# EAGLE board Micro_Bit_Gamer_Bit_Panel_v10 (EAGLE 7.5.0)
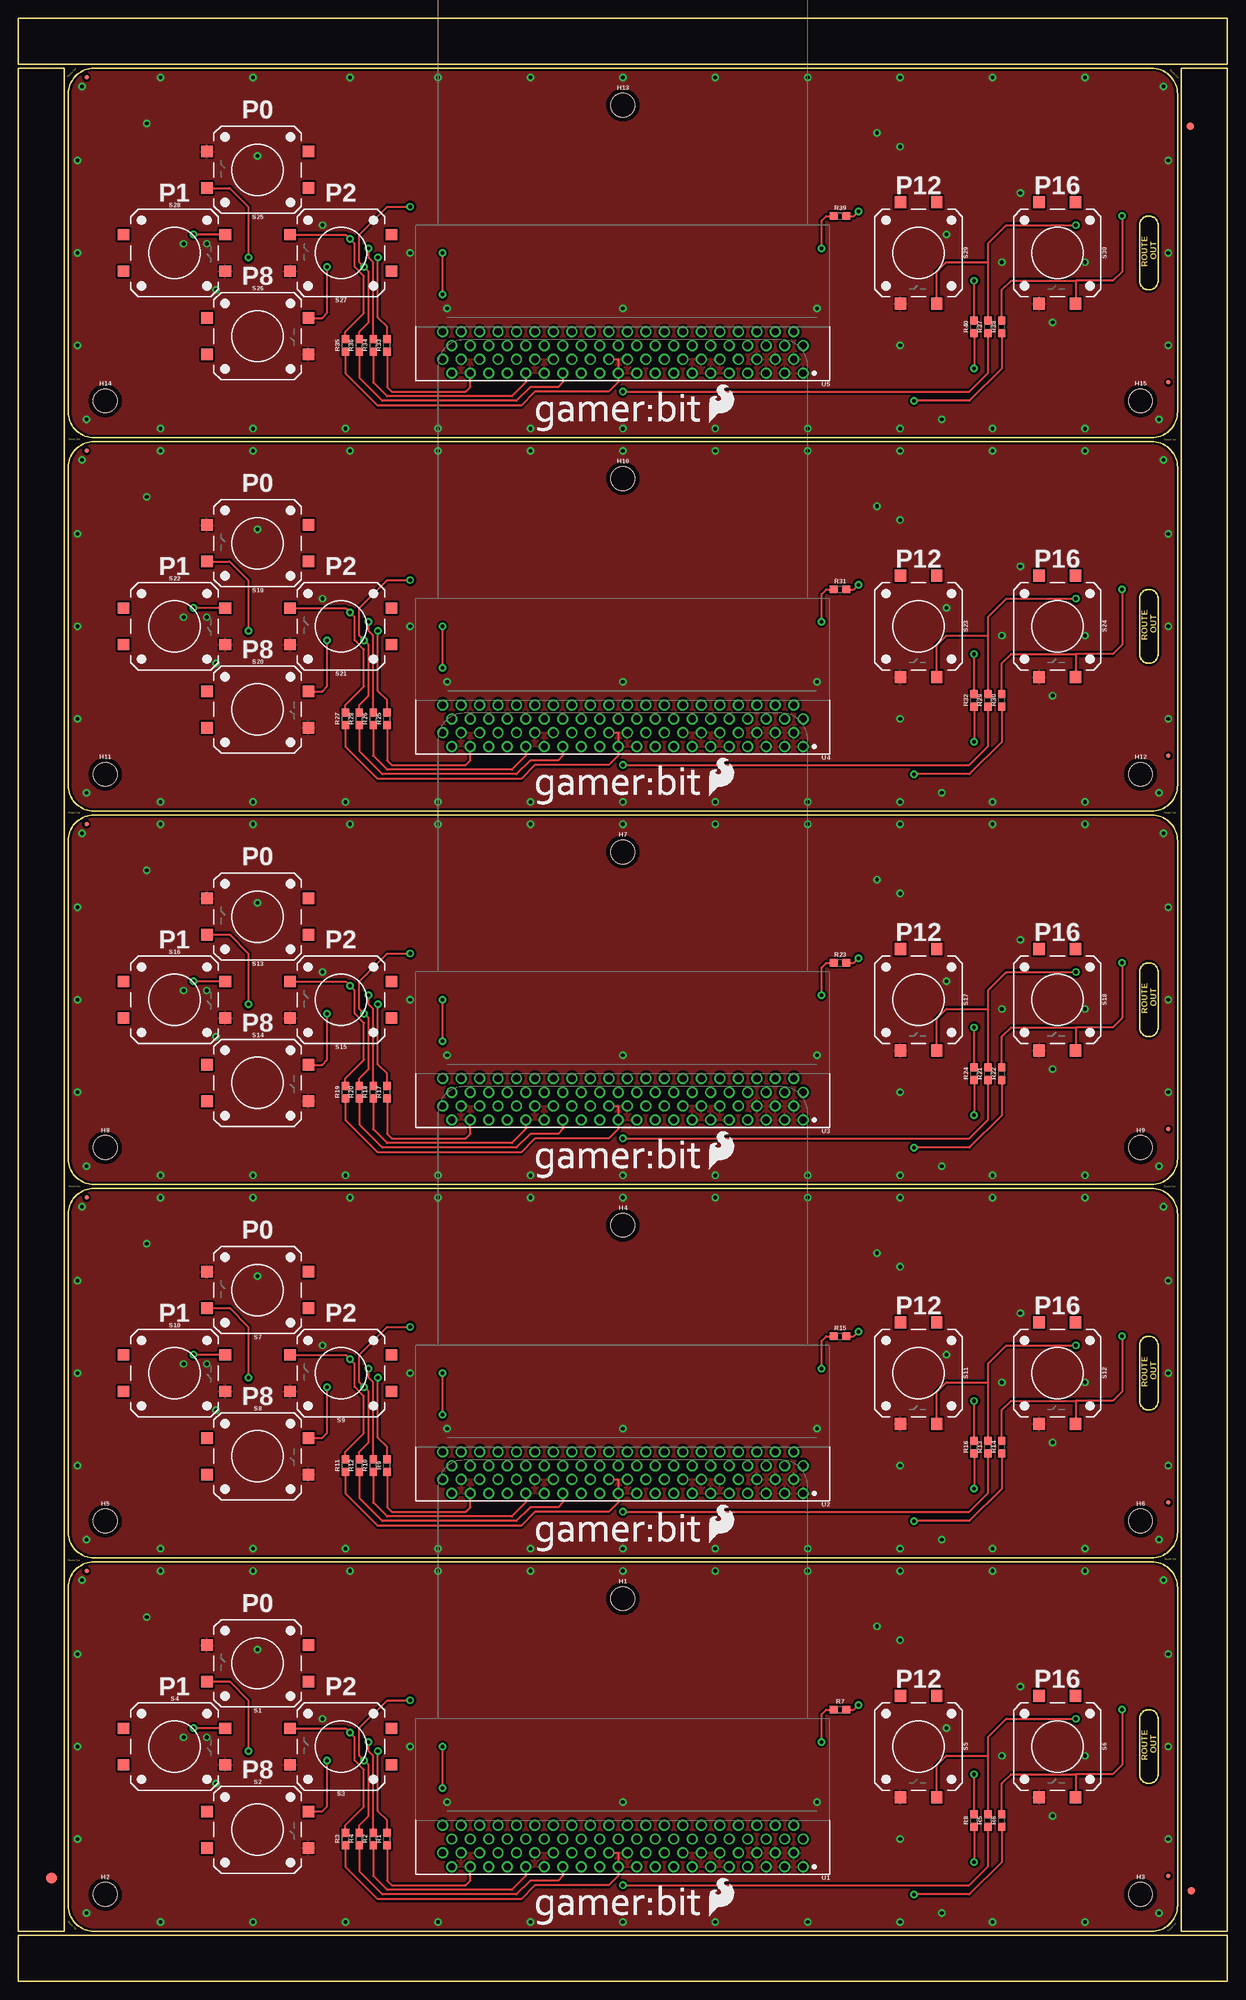
[diagram p0: board, top side]
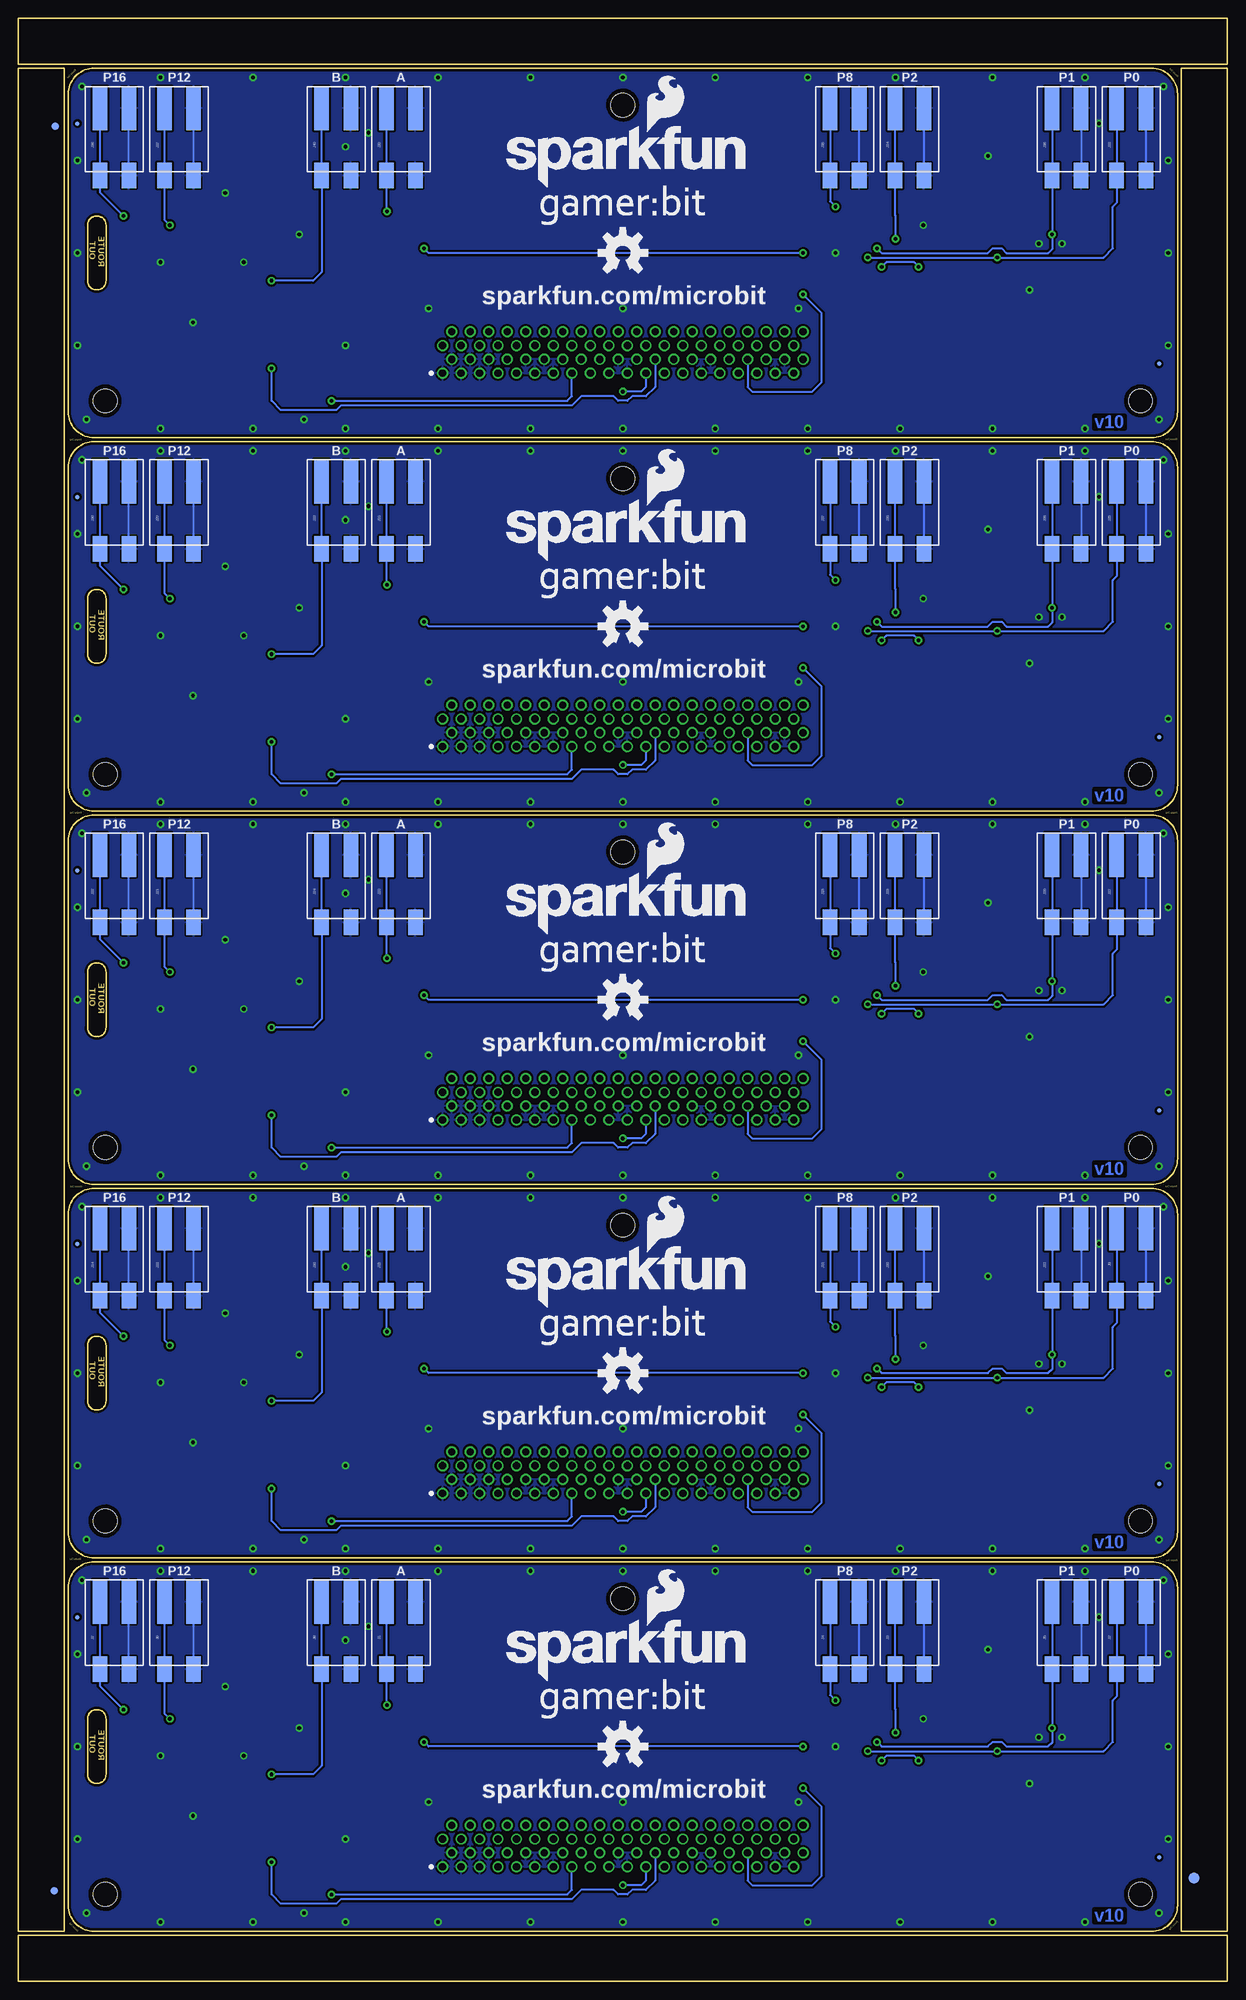
[diagram p1: board, bottom side, seen from below]

Size 166.12 x 269.75 mm. Coordinates in mm from the lower left corner, seen from the top.
Outline: 6.35,79.25 6.35,6.86 0,6.86 0,29.72
Outline: 0,27.18 0,262.89 6.35,262.89 6.35,76.71
Outline: 79.25,0 0,0 0,6.35 29.72,6.35
Outline: 27.18,6.35 166.12,6.35 166.12,0 76.71,0
Outline: 166.12,79.25 166.12,6.86 159.77,6.86 159.77,29.72
Outline: 159.77,27.18 159.77,262.89 166.12,262.89 166.12,76.71
Outline: 86.87,269.75 166.12,269.75 166.12,263.4 136.4,263.4
Outline: 138.94,263.4 0,263.4 0,269.75 89.41,269.75
Outline: 155.67,57.66 10.45,57.66 arc90 6.86,54.07 6.86,10.45 arc90 10.45,6.86 155.67,6.86 arc90 159.26,10.45 159.26,54.07 arc90 155.67,57.66
Outline: 156.59,36.07 156.59,28.45 arc-90 155.32,27.18 arc-90 154.05,28.45 154.05,36.07 arc-90 155.32,37.34 arc-90 156.59,36.07
Outline: 155.67,108.97 10.45,108.97 arc90 6.86,105.37 6.86,61.76 arc90 10.45,58.17 155.67,58.17 arc90 159.26,61.76 159.26,105.37 arc90 155.67,108.97
Outline: 156.59,87.38 156.59,79.76 arc-90 155.32,78.49 arc-90 154.05,79.76 154.05,87.38 arc-90 155.32,88.65 arc-90 156.59,87.38
Outline: 155.67,160.27 10.45,160.27 arc90 6.86,156.68 6.86,113.07 arc90 10.45,109.47 155.67,109.47 arc90 159.26,113.07 159.26,156.68 arc90 155.67,160.27
Outline: 156.59,138.68 156.59,131.06 arc-90 155.32,129.79 arc-90 154.05,131.06 154.05,138.68 arc-90 155.32,139.95 arc-90 156.59,138.68
Outline: 155.67,211.58 10.45,211.58 arc90 6.86,207.99 6.86,164.37 arc90 10.45,160.78 155.67,160.78 arc90 159.26,164.37 159.26,207.99 arc90 155.67,211.58
Outline: 156.59,189.99 156.59,182.37 arc-90 155.32,181.1 arc-90 154.05,182.37 154.05,189.99 arc-90 155.32,191.26 arc-90 156.59,189.99
Outline: 155.67,262.89 10.45,262.89 arc90 6.86,259.3 6.86,215.68 arc90 10.45,212.09 155.67,212.09 arc90 159.26,215.68 159.26,259.3 arc90 155.67,262.89
Outline: 156.59,241.3 156.59,233.68 arc-90 155.32,232.41 arc-90 154.05,233.68 154.05,241.3 arc-90 155.32,242.57 arc-90 156.59,241.3
Copper layers (1*16): Top 0.035mm / dielectric 1.5mm / Bottom 0.035mm
Design rules "SparkFun-2-layer-STANDARD": minimum track width 10mil, minimum drill 20mil, track to track 10mil, track to pad 8mil, pad to pad 8mil, via to via 10mil, smd to smd 8mil, copper to edge 8mil, drill to drill 8mil, minimum pad ring 10mil, minimum via ring 10mil, stop-mask expansion 4mil, vias tented up to drill 25mil, thermal gap 10mil

## Footprints (pad centres in the part's own frame; a part is rotated, then mirrored left to right if it is on the bottom)
FIDUCIAL-1.5X3 = smd 1.5 x 1.5: 1 0,0
FIDUCIAL-1X2 = smd 1 x 1: 1 0,0
FIDUCIAL-MICRO = smd 0.635 x 0.635: 1 0,0
STAND-OFF = hole 3.302: 0,0
1X02_POKEHOME = smd 3.5 x 2: P1 5.25,2; P2 5.25,-2 | smd 6 x 2: P3 -4,2; P4 -4,-2
0603 = smd 1.1 x 1: 1 -0.85,0; 2 0.85,0
TACTILE_SWITCH_SMD_12MM = smd 1.6 x 1.55: 1 6.975,-2.5; 2 -6.975,-2.5; 3 6.975,2.5; 4 -6.975,2.5
MICRO:BIT_RA_PTH = drill 1: A1 -24.765,7.62; A2 -23.495,5.72; A3 -22.225,7.62; A4 -20.955,5.72; A5 -19.685,7.62; A6 -18.415,5.72; A7 -17.145,7.62; A8 -15.875,5.72; A9 -14.605,7.62; A10 -13.335,5.72; A11 -12.065,7.62; A12 -10.795,5.72; A13 -9.525,7.62; A14 -8.255,5.72; A15 -6.985,7.62; A16 -5.715,5.72; A17 -4.445,7.62; A18 -3.175,5.72; A19 -1.905,7.62; A20 -0.635,5.72; A21 0.635,7.62; A22 1.905,5.72; A23 3.175,7.62; A24 4.445,5.72; A25 5.715,7.62; A26 6.985,5.72; A27 8.255,7.62; A28 9.525,5.72; A29 10.795,7.62; A30 12.065,5.72; A31 13.335,7.62; A32 14.605,5.72; A33 15.875,7.62; A34 17.145,5.72; A35 18.415,7.62; A36 19.685,5.72; A37 20.955,7.62; A38 22.225,5.72; A39 23.495,7.62; A40 24.765,5.72; B1 -24.765,3.82; B2 -23.495,1.92; B3 -22.225,3.82; B4 -20.955,1.92; B5 -19.685,3.82; B6 -18.415,1.92; B7 -17.145,3.82; B8 -15.875,1.92; B9 -14.605,3.82; B10 -13.335,1.92; B11 -12.065,3.82; B12 -10.795,1.92; B13 -9.525,3.82; B14 -8.255,1.92; B15 -6.985,3.82; B16 -5.715,1.92; B17 -4.445,3.82; B18 -3.175,1.92; B19 -1.905,3.82; B20 -0.635,1.92; B21 0.635,3.82; B22 1.905,1.92; B23 3.175,3.82; B24 4.445,1.92; B25 5.715,3.82; B26 6.985,1.92; B27 8.255,3.82; B28 9.525,1.92; B29 10.795,3.82; B30 12.065,1.92; B31 13.335,3.82; B32 14.605,1.92; B33 15.875,3.82; B34 17.145,1.92; B35 18.415,3.82; B36 19.685,1.92; B37 20.955,3.82; B38 22.225,1.92; B39 23.495,3.82; B40 24.765,1.92

## Placement (x,y rotation side)
E$1  [FIDUCIAL-1.5X3]  4.57,14.22 0 top
E$2  [FIDUCIAL-1.5X3]  4.57,14.22 0 bottom
E$3  [FIDUCIAL-1X2]  161.16,12.45 0 bottom
E$4  [FIDUCIAL-1X2]  161.04,254.89 90 bottom
E$5  [FIDUCIAL-1X2]  161.16,12.45 0 top
E$7  [FIDUCIAL-1X2]  161.04,254.89 90 top
FD1  FIDUCIALUFIDUCIAL  [FIDUCIAL-MICRO]  9.4,56.39 0 top
FD2  FIDUCIALUFIDUCIAL  [FIDUCIAL-MICRO]  157.99,14.48 0 top
FD3  FIDUCIALUFIDUCIAL  [FIDUCIAL-MICRO]  9.4,17.02 0 bottom
FD4  FIDUCIALUFIDUCIAL  [FIDUCIAL-MICRO]  157.99,50.04 0 bottom
FD5  FIDUCIALUFIDUCIAL  [FIDUCIAL-MICRO]  9.4,107.7 0 top
FD6  FIDUCIALUFIDUCIAL  [FIDUCIAL-MICRO]  157.99,65.79 0 top
FD7  FIDUCIALUFIDUCIAL  [FIDUCIAL-MICRO]  9.4,68.33 0 bottom
FD8  FIDUCIALUFIDUCIAL  [FIDUCIAL-MICRO]  157.99,101.35 0 bottom
FD9  FIDUCIALUFIDUCIAL  [FIDUCIAL-MICRO]  9.4,159 0 top
FD10  FIDUCIALUFIDUCIAL  [FIDUCIAL-MICRO]  157.99,117.09 0 top
FD11  FIDUCIALUFIDUCIAL  [FIDUCIAL-MICRO]  9.4,119.63 0 bottom
FD12  FIDUCIALUFIDUCIAL  [FIDUCIAL-MICRO]  157.99,152.65 0 bottom
FD13  FIDUCIALUFIDUCIAL  [FIDUCIAL-MICRO]  9.4,210.31 0 top
FD14  FIDUCIALUFIDUCIAL  [FIDUCIAL-MICRO]  157.99,168.4 0 top
FD15  FIDUCIALUFIDUCIAL  [FIDUCIAL-MICRO]  9.4,170.94 0 bottom
FD16  FIDUCIALUFIDUCIAL  [FIDUCIAL-MICRO]  157.99,203.96 0 bottom
FD17  FIDUCIALUFIDUCIAL  [FIDUCIAL-MICRO]  9.4,261.62 0 top
FD18  FIDUCIALUFIDUCIAL  [FIDUCIAL-MICRO]  157.99,219.71 0 top
FD19  FIDUCIALUFIDUCIAL  [FIDUCIAL-MICRO]  9.4,222.25 0 bottom
FD20  FIDUCIALUFIDUCIAL  [FIDUCIAL-MICRO]  157.99,255.27 0 bottom
H1  STAND-OFF  [STAND-OFF]  83.06,52.58 0 top
H2  STAND-OFF  [STAND-OFF]  11.94,11.94 0 top
H3  STAND-OFF  [STAND-OFF]  154.18,11.94 0 top
H4  STAND-OFF  [STAND-OFF]  83.06,103.89 0 top
H5  STAND-OFF  [STAND-OFF]  11.94,63.25 0 top
H6  STAND-OFF  [STAND-OFF]  154.18,63.25 0 top
H7  STAND-OFF  [STAND-OFF]  83.06,155.19 0 top
H8  STAND-OFF  [STAND-OFF]  11.94,114.55 0 top
H9  STAND-OFF  [STAND-OFF]  154.18,114.55 0 top
H10  STAND-OFF  [STAND-OFF]  83.06,206.5 0 top
H11  STAND-OFF  [STAND-OFF]  11.94,165.86 0 top
H12  STAND-OFF  [STAND-OFF]  154.18,165.86 0 top
H13  STAND-OFF  [STAND-OFF]  83.06,257.81 0 top
H14  STAND-OFF  [STAND-OFF]  11.94,217.17 0 top
H15  STAND-OFF  [STAND-OFF]  154.18,217.17 0 top
J1  Pokehome  [1X02_POKEHOME]  113.54,48.13 270 bottom
J2  Pokehome  [1X02_POKEHOME]  13.21,48.13 270 bottom
J3  Pokehome  [1X02_POKEHOME]  43.69,48.13 270 bottom
J4  Pokehome  [1X02_POKEHOME]  52.58,48.13 270 bottom
J5  Pokehome  [1X02_POKEHOME]  22.1,48.13 270 bottom
J6  Pokehome  [1X02_POKEHOME]  144.02,48.13 270 bottom
J7  Pokehome  [1X02_POKEHOME]  152.91,48.13 270 bottom
J8  Pokehome  [1X02_POKEHOME]  122.43,48.13 270 bottom
J9  Pokehome  [1X02_POKEHOME]  13.21,99.44 270 bottom
J10  Pokehome  [1X02_POKEHOME]  43.69,99.44 270 bottom
J11  Pokehome  [1X02_POKEHOME]  52.58,99.44 270 bottom
J12  Pokehome  [1X02_POKEHOME]  22.1,99.44 270 bottom
J13  Pokehome  [1X02_POKEHOME]  144.02,99.44 270 bottom
J14  Pokehome  [1X02_POKEHOME]  152.91,99.44 270 bottom
J15  Pokehome  [1X02_POKEHOME]  113.54,99.44 270 bottom
J16  Pokehome  [1X02_POKEHOME]  122.43,99.44 270 bottom
J17  Pokehome  [1X02_POKEHOME]  13.21,150.75 270 bottom
J18  Pokehome  [1X02_POKEHOME]  43.69,150.75 270 bottom
J19  Pokehome  [1X02_POKEHOME]  52.58,150.75 270 bottom
J20  Pokehome  [1X02_POKEHOME]  22.1,150.75 270 bottom
J21  Pokehome  [1X02_POKEHOME]  144.02,150.75 270 bottom
J22  Pokehome  [1X02_POKEHOME]  152.91,150.75 270 bottom
J23  Pokehome  [1X02_POKEHOME]  113.54,150.75 270 bottom
J24  Pokehome  [1X02_POKEHOME]  122.43,150.75 270 bottom
J25  Pokehome  [1X02_POKEHOME]  13.21,202.06 270 bottom
J26  Pokehome  [1X02_POKEHOME]  43.69,202.06 270 bottom
J27  Pokehome  [1X02_POKEHOME]  52.58,202.06 270 bottom
J28  Pokehome  [1X02_POKEHOME]  22.1,202.06 270 bottom
J29  Pokehome  [1X02_POKEHOME]  144.02,202.06 270 bottom
J30  Pokehome  [1X02_POKEHOME]  152.91,202.06 270 bottom
J31  Pokehome  [1X02_POKEHOME]  113.54,202.06 270 bottom
J32  Pokehome  [1X02_POKEHOME]  122.43,202.06 270 bottom
J33  Pokehome  [1X02_POKEHOME]  13.21,253.37 270 bottom
J34  Pokehome  [1X02_POKEHOME]  43.69,253.37 270 bottom
J35  Pokehome  [1X02_POKEHOME]  52.58,253.37 270 bottom
J36  Pokehome  [1X02_POKEHOME]  22.1,253.37 270 bottom
J37  Pokehome  [1X02_POKEHOME]  144.02,253.37 270 bottom
J38  Pokehome  [1X02_POKEHOME]  152.91,253.37 270 bottom
J39  Pokehome  [1X02_POKEHOME]  113.54,253.37 270 bottom
J40  Pokehome  [1X02_POKEHOME]  122.43,253.37 270 bottom
LOGO1  SFE_LOGO_FLAME.2_INCH  [SFE_LOGO_FLAME_.2]  94.61,8.76 0 top
LOGO2  OSHW-LOGOL  [OSHW-LOGO-L]  83.06,32.26 0 bottom
LOGO3  SFE_LOGO_NAME_FLAME.3_INCH  [SFE_LOGO_NAME_FLAME_.3]  99.57,41.15 0 bottom
LOGO4  SFE_LOGO_FLAME.2_INCH  [SFE_LOGO_FLAME_.2]  94.61,60.07 0 top
LOGO5  OSHW-LOGOL  [OSHW-LOGO-L]  83.06,83.57 0 bottom
LOGO6  SFE_LOGO_NAME_FLAME.3_INCH  [SFE_LOGO_NAME_FLAME_.3]  99.57,92.46 0 bottom
LOGO7  SFE_LOGO_FLAME.2_INCH  [SFE_LOGO_FLAME_.2]  94.61,111.38 0 top
LOGO8  OSHW-LOGOL  [OSHW-LOGO-L]  83.06,134.87 0 bottom
LOGO9  SFE_LOGO_NAME_FLAME.3_INCH  [SFE_LOGO_NAME_FLAME_.3]  99.57,143.76 0 bottom
LOGO10  SFE_LOGO_FLAME.2_INCH  [SFE_LOGO_FLAME_.2]  94.61,162.69 0 top
LOGO11  OSHW-LOGOL  [OSHW-LOGO-L]  83.06,186.18 0 bottom
LOGO12  SFE_LOGO_NAME_FLAME.3_INCH  [SFE_LOGO_NAME_FLAME_.3]  99.57,195.07 0 bottom
LOGO13  SFE_LOGO_FLAME.2_INCH  [SFE_LOGO_FLAME_.2]  94.61,214 0 top
LOGO14  OSHW-LOGOL  [OSHW-LOGO-L]  83.06,237.49 0 bottom
LOGO15  SFE_LOGO_NAME_FLAME.3_INCH  [SFE_LOGO_NAME_FLAME_.3]  99.57,246.38 0 bottom
R1  2.2k  [0603]  50.67,19.56 90 top
R2  2.2k  [0603]  48.77,19.56 90 top
R3  2.2k  [0603]  44.96,19.56 90 top
R4  2.2k  [0603]  46.86,19.56 90 top
R5  2.2k  [0603]  133.22,22.1 90 top
R6  2.2k  [0603]  135.13,22.1 90 top
R7  2.2k  [0603]  112.9,37.34 0 top
R8  2.2k  [0603]  131.32,22.1 90 top
R9  2.2k  [0603]  50.67,70.87 90 top
R10  2.2k  [0603]  48.77,70.87 90 top
R11  2.2k  [0603]  44.96,70.87 90 top
R12  2.2k  [0603]  46.86,70.87 90 top
R13  2.2k  [0603]  133.22,73.41 90 top
R14  2.2k  [0603]  135.13,73.41 90 top
R15  2.2k  [0603]  112.9,88.65 0 top
R16  2.2k  [0603]  131.32,73.41 90 top
R17  2.2k  [0603]  50.67,122.17 90 top
R18  2.2k  [0603]  48.77,122.17 90 top
R19  2.2k  [0603]  44.96,122.17 90 top
R20  2.2k  [0603]  46.86,122.17 90 top
R21  2.2k  [0603]  133.22,124.71 90 top
R22  2.2k  [0603]  135.13,124.71 90 top
R23  2.2k  [0603]  112.9,139.95 0 top
R24  2.2k  [0603]  131.32,124.71 90 top
R25  2.2k  [0603]  50.67,173.48 90 top
R26  2.2k  [0603]  48.77,173.48 90 top
R27  2.2k  [0603]  44.96,173.48 90 top
R28  2.2k  [0603]  46.86,173.48 90 top
R29  2.2k  [0603]  133.22,176.02 90 top
R30  2.2k  [0603]  135.13,176.02 90 top
R31  2.2k  [0603]  112.9,191.26 0 top
R32  2.2k  [0603]  131.32,176.02 90 top
R33  2.2k  [0603]  50.67,224.79 90 top
R34  2.2k  [0603]  48.77,224.79 90 top
R35  2.2k  [0603]  44.96,224.79 90 top
R36  2.2k  [0603]  46.86,224.79 90 top
R37  2.2k  [0603]  133.22,227.33 90 top
R38  2.2k  [0603]  135.13,227.33 90 top
R39  2.2k  [0603]  112.9,242.57 0 top
R40  2.2k  [0603]  131.32,227.33 90 top
S1  TACT  [TACTILE_SWITCH_SMD_12MM]  32.89,43.69 180 top
S2  TACT  [TACTILE_SWITCH_SMD_12MM]  32.89,20.83 0 top
S3  TACT  [TACTILE_SWITCH_SMD_12MM]  44.32,32.26 180 top
S4  TACT  [TACTILE_SWITCH_SMD_12MM]  21.46,32.26 0 top
S5  TACT  [TACTILE_SWITCH_SMD_12MM]  123.7,32.26 270 top
S6  TACT  [TACTILE_SWITCH_SMD_12MM]  142.75,32.26 270 top
S7  TACT  [TACTILE_SWITCH_SMD_12MM]  32.89,95 180 top
S8  TACT  [TACTILE_SWITCH_SMD_12MM]  32.89,72.14 0 top
S9  TACT  [TACTILE_SWITCH_SMD_12MM]  44.32,83.57 180 top
S10  TACT  [TACTILE_SWITCH_SMD_12MM]  21.46,83.57 0 top
S11  TACT  [TACTILE_SWITCH_SMD_12MM]  123.7,83.57 270 top
S12  TACT  [TACTILE_SWITCH_SMD_12MM]  142.75,83.57 270 top
S13  TACT  [TACTILE_SWITCH_SMD_12MM]  32.89,146.3 180 top
S14  TACT  [TACTILE_SWITCH_SMD_12MM]  32.89,123.44 0 top
S15  TACT  [TACTILE_SWITCH_SMD_12MM]  44.32,134.87 180 top
S16  TACT  [TACTILE_SWITCH_SMD_12MM]  21.46,134.87 0 top
S17  TACT  [TACTILE_SWITCH_SMD_12MM]  123.7,134.87 270 top
S18  TACT  [TACTILE_SWITCH_SMD_12MM]  142.75,134.87 270 top
S19  TACT  [TACTILE_SWITCH_SMD_12MM]  32.89,197.61 180 top
S20  TACT  [TACTILE_SWITCH_SMD_12MM]  32.89,174.75 0 top
S21  TACT  [TACTILE_SWITCH_SMD_12MM]  44.32,186.18 180 top
S22  TACT  [TACTILE_SWITCH_SMD_12MM]  21.46,186.18 0 top
S23  TACT  [TACTILE_SWITCH_SMD_12MM]  123.7,186.18 270 top
S24  TACT  [TACTILE_SWITCH_SMD_12MM]  142.75,186.18 270 top
S25  TACT  [TACTILE_SWITCH_SMD_12MM]  32.89,248.92 180 top
S26  TACT  [TACTILE_SWITCH_SMD_12MM]  32.89,226.06 0 top
S27  TACT  [TACTILE_SWITCH_SMD_12MM]  44.32,237.49 180 top
S28  TACT  [TACTILE_SWITCH_SMD_12MM]  21.46,237.49 0 top
S29  TACT  [TACTILE_SWITCH_SMD_12MM]  123.7,237.49 270 top
S30  TACT  [TACTILE_SWITCH_SMD_12MM]  142.75,237.49 270 top
U1  micro:bit  [MICRO:BIT_RA_PTH]  83.06,23.37 180 top
U2  micro:bit  [MICRO:BIT_RA_PTH]  83.06,74.68 180 top
U3  micro:bit  [MICRO:BIT_RA_PTH]  83.06,125.98 180 top
U4  micro:bit  [MICRO:BIT_RA_PTH]  83.06,177.29 180 top
U5  micro:bit  [MICRO:BIT_RA_PTH]  83.06,228.6 180 top
U$1  LOGO-GAMERBIT  [LOGO-GAMERBIT]  70.99,58.93 0 top
U$2  LOGO-GAMERBIT  [LOGO-GAMERBIT]  70.99,7.62 0 top
U$3  LOGO-GAMERBIT  [LOGO-GAMERBIT]  94.49,35.94 0 bottom
U$4  LOGO-GAMERBIT  [LOGO-GAMERBIT]  94.49,87.25 0 bottom
U$5  LOGO-GAMERBIT  [LOGO-GAMERBIT]  70.99,110.24 0 top
U$6  LOGO-GAMERBIT  [LOGO-GAMERBIT]  94.49,138.56 0 bottom
U$7  LOGO-GAMERBIT  [LOGO-GAMERBIT]  70.99,161.54 0 top
U$8  LOGO-GAMERBIT  [LOGO-GAMERBIT]  94.49,189.87 0 bottom
U$9  LOGO-GAMERBIT  [LOGO-GAMERBIT]  70.99,212.85 0 top
U$10  LOGO-GAMERBIT  [LOGO-GAMERBIT]  94.49,241.17 0 bottom

## Library data of the parts
E$1 E$2 = SparkFun-Retired
E$3-E$5 E$7 FD1-FD20 LOGO1-LOGO15 = SparkFun-Aesthetics
H1-H15 = SparkFun-Hardware
J1-J40 = SparkFun-Connectors; PROD_ID: CONN-13512
R1-R40 = SparkFun-Resistors; PROD_ID: RES-08272
S1-S30 = SparkFun-Switches; PROD_ID: SWCH-11967; SF_SKU: COM-12993
U1-U5 = Micro_Bit_Parts; PROD_ID: CONN-13452
U$1-U$10 = Micro_Bit_Parts

## Nets
3.3V: U1.A9 U1.A10 U1.A11 U1.A12 U1.A13 U1.A14
3.3V1: U2.A9 U2.A10 U2.A11 U2.A12 U2.A13 U2.A14
3.3V2: U3.A9 U3.A10 U3.A11 U3.A12 U3.A13 U3.A14
3.3V3: U4.A9 U4.A10 U4.A11 U4.A12 U4.A13 U4.A14
3.3V4: U5.A9 U5.A10 U5.A11 U5.A12 U5.A13 U5.A14
BTN_A: R7.1 U1.A34
BTN_A1: R15.1 U2.A34
BTN_A2: R23.1 U3.A34
BTN_A3: R31.1 U4.A34
BTN_A4: R39.1 U5.A34
BTN_B: R8.1 U1.A24
BTN_B1: R16.1 U2.A24
BTN_B2: R24.1 U3.A24
BTN_B3: R32.1 U4.A24
BTN_B4: R40.1 U5.A24
BTN_DN: R4.1 U1.A27
BTN_DN1: R12.1 U2.A27
BTN_DN2: R20.1 U3.A27
BTN_DN3: R28.1 U4.A27
BTN_DN4: R36.1 U5.A27
BTN_L: R2.1 U1.A28 U1.A29 U1.A30 U1.A31
BTN_L1: R10.1 U2.A28 U2.A29 U2.A30 U2.A31
BTN_L2: R18.1 U3.A28 U3.A29 U3.A30 U3.A31
BTN_L3: R26.1 U4.A28 U4.A29 U4.A30 U4.A31
BTN_L4: R34.1 U5.A28 U5.A29 U5.A30 U5.A31
BTN_P1: R14.1 U2.A15
BTN_P2: R13.1 U2.A23
BTN_P3: R22.1 U3.A15
BTN_P4: R21.1 U3.A23
BTN_P5: R30.1 U4.A15
BTN_P6: R29.1 U4.A23
BTN_P7: R38.1 U5.A15
BTN_P8: R37.1 U5.A23
BTN_P12: R5.1 U1.A23
BTN_P16: R6.1 U1.A15
BTN_R: R3.1 U1.A19 U1.A20 U1.A21 U1.A22
BTN_R1: R11.1 U2.A19 U2.A20 U2.A21 U2.A22
BTN_R2: R19.1 U3.A19 U3.A20 U3.A21 U3.A22
BTN_R3: R27.1 U4.A19 U4.A20 U4.A21 U4.A22
BTN_R4: R35.1 U5.A19 U5.A20 U5.A21 U5.A22
BTN_UP: R1.1 U1.A36 U1.A37 U1.A38 U1.A39
BTN_UP1: R9.1 U2.A36 U2.A37 U2.A38 U2.A39
BTN_UP2: R17.1 U3.A36 U3.A37 U3.A38 U3.A39
BTN_UP3: R25.1 U4.A36 U4.A37 U4.A38 U4.A39
BTN_UP4: R33.1 U5.A36 U5.A37 U5.A38 U5.A39
GND: J1.P1 J1.P3 J2.P1 J2.P3 J3.P1 J3.P3 J4.P1 J4.P3 J5.P1 J5.P3 J6.P1 J6.P3 J7.P1 J7.P3 J8.P1 J8.P3 S1.1 S2.1 S3.3 S4.1 S5.1 S6.1 U1.A1 U1.A2 U1.A3 U1.A4 U1.A5 U1.A6
GND1: J9.P1 J9.P3 J10.P1 J10.P3 J11.P1 J11.P3 J12.P1 J12.P3 J13.P1 J13.P3 J14.P1 J14.P3 J15.P1 J15.P3 J16.P1 J16.P3 S7.1 S8.1 S9.3 S10.1 S11.1 S12.1 U2.A1 U2.A2 U2.A3 U2.A4 U2.A5 U2.A6
GND2: J17.P1 J17.P3 J18.P1 J18.P3 J19.P1 J19.P3 J20.P1 J20.P3 J21.P1 J21.P3 J22.P1 J22.P3 J23.P1 J23.P3 J24.P1 J24.P3 S13.1 S14.1 S15.3 S16.1 S17.1 S18.1 U3.A1 U3.A2 U3.A3 U3.A4 U3.A5 U3.A6
GND3: J25.P1 J25.P3 J26.P1 J26.P3 J27.P1 J27.P3 J28.P1 J28.P3 J29.P1 J29.P3 J30.P1 J30.P3 J31.P1 J31.P3 J32.P1 J32.P3 S19.1 S20.1 S21.3 S22.1 S23.1 S24.1 U4.A1 U4.A2 U4.A3 U4.A4 U4.A5 U4.A6
GND4: J33.P1 J33.P3 J34.P1 J34.P3 J35.P1 J35.P3 J36.P1 J36.P3 J37.P1 J37.P3 J38.P1 J38.P3 J39.P1 J39.P3 J40.P1 J40.P3 S25.1 S26.1 S27.3 S28.1 S29.1 S30.1 U5.A1 U5.A2 U5.A3 U5.A4 U5.A5 U5.A6
N$1: J2.P2 J2.P4 R1.2 S1.3
N$2: J5.P2 J5.P4 R2.2 S4.3
N$3: J4.P2 J4.P4 R4.2 S2.3
N$4: J3.P2 J3.P4 R3.2 S3.1
N$5: J7.P2 J7.P4 R6.2 S6.3
N$6: J8.P2 J8.P4 R8.2
N$7: J1.P2 J1.P4 R7.2
N$8: J9.P2 J9.P4 R9.2 S7.3
N$9: J12.P2 J12.P4 R10.2 S10.3
N$10: J11.P2 J11.P4 R12.2 S8.3
N$11: J10.P2 J10.P4 R11.2 S9.1
N$12: J13.P2 J13.P4 R13.2 S11.3
N$13: J14.P2 J14.P4 R14.2 S12.3
N$14: J15.P2 J15.P4 R15.2
N$15: J16.P2 J16.P4 R16.2
N$16: J17.P2 J17.P4 R17.2 S13.3
N$17: J20.P2 J20.P4 R18.2 S16.3
N$18: J19.P2 J19.P4 R20.2 S14.3
N$19: J18.P2 J18.P4 R19.2 S15.1
N$20: J21.P2 J21.P4 R21.2 S17.3
N$21: J22.P2 J22.P4 R22.2 S18.3
N$22: J23.P2 J23.P4 R23.2
N$23: J24.P2 J24.P4 R24.2
N$24: J25.P2 J25.P4 R25.2 S19.3
N$25: J28.P2 J28.P4 R26.2 S22.3
N$26: J27.P2 J27.P4 R28.2 S20.3
N$27: J26.P2 J26.P4 R27.2 S21.1
N$28: J29.P2 J29.P4 R29.2 S23.3
N$29: J30.P2 J30.P4 R30.2 S24.3
N$30: J31.P2 J31.P4 R31.2
N$31: J32.P2 J32.P4 R32.2
N$32: J33.P2 J33.P4 R33.2 S25.3
N$33: J36.P2 J36.P4 R34.2 S28.3
N$34: J35.P2 J35.P4 R36.2 S26.3
N$35: J34.P2 J34.P4 R35.2 S27.1
N$36: J37.P2 J37.P4 R37.2 S29.3
N$37: J38.P2 J38.P4 R38.2 S30.3
N$38: J39.P2 J39.P4 R39.2
N$39: J40.P2 J40.P4 R40.2
N$80: J6.P2 J6.P4 R5.2 S5.3

## Tracks (layer width: path | path; a pad name or v marks a point on that pad's centre or on a via)
3.3V
  pour Top (isolate 0.305): 91.31,17.65 92.58,15.75 97.66,15.75 96.39,17.65
  pour Bottom (isolate 0.305): 96.39,17.65 97.66,15.75 92.58,15.75 91.31,17.65
3.3V1
  pour Top (isolate 0.305): 91.31,68.96 92.58,67.06 97.66,67.06 96.39,68.96
  pour Bottom (isolate 0.305): 96.39,68.96 97.66,67.06 92.58,67.06 91.31,68.96
3.3V2
  pour Top (isolate 0.305): 91.31,120.27 92.58,118.36 97.66,118.36 96.39,120.27
  pour Bottom (isolate 0.305): 96.39,120.27 97.66,118.36 92.58,118.36 91.31,120.27
3.3V3
  pour Top (isolate 0.305): 91.31,171.58 92.58,169.67 97.66,169.67 96.39,171.58
  pour Bottom (isolate 0.305): 96.39,171.58 97.66,169.67 92.58,169.67 91.31,171.58
3.3V4
  pour Top (isolate 0.305): 91.31,222.88 92.58,220.98 97.66,220.98 96.39,222.88
  pour Bottom (isolate 0.305): 96.39,222.88 97.66,220.98 92.58,220.98 91.31,222.88
BTN_A  (via drill 0.51)
  Top 0.254: v58.29,26.54 v58.29,32.26 | v110.36,32.89 110.36,36.7 111,37.34 R7.1
  Bottom 0.254: U1.A34 65.91,13.84 65.28,13.21 57.02,13.21 55.75,14.48 55.75,24 v58.29,26.54 | v58.29,32.26 109.73,32.26 v110.36,32.89
BTN_A1  (via drill 0.51)
  Top 0.254: v58.29,77.85 v58.29,83.57 | v110.36,84.2 110.36,88.01 111,88.65 R15.1
  Bottom 0.254: U2.A34 65.91,65.15 65.28,64.52 57.02,64.52 55.75,65.79 55.75,75.31 v58.29,77.85 | v58.29,83.57 109.73,83.57 v110.36,84.2
BTN_A2  (via drill 0.51)
  Top 0.254: v58.29,129.16 v58.29,134.87 | v110.36,135.51 110.36,139.32 111,139.95 R23.1
  Bottom 0.254: U3.A34 65.91,116.46 65.28,115.82 57.02,115.82 55.75,117.09 55.75,126.62 v58.29,129.16 | v58.29,134.87 109.73,134.87 v110.36,135.51
BTN_A3  (via drill 0.51)
  Top 0.254: v58.29,180.47 v58.29,186.18 | v110.36,186.82 110.36,190.63 111,191.26 R31.1
  Bottom 0.254: U4.A34 65.91,167.77 65.28,167.13 57.02,167.13 55.75,168.4 55.75,177.93 v58.29,180.47 | v58.29,186.18 109.73,186.18 v110.36,186.82
BTN_A4  (via drill 0.51)
  Top 0.254: v58.29,231.78 v58.29,237.49 | v110.36,238.12 110.36,241.94 111,242.57 R39.1
  Bottom 0.254: U5.A34 65.91,219.07 65.28,218.44 57.02,218.44 55.75,219.71 55.75,229.24 v58.29,231.78 | v58.29,237.49 109.73,237.49 v110.36,238.12
BTN_B  (via drill 0.51)
  Top 0.254: R8.1 v131.32,16.38
  Bottom 0.254: U1.A24 78.61,13.84 79.88,12.57 81.79,12.57 82.42,11.94 83.69,11.94 84.33,12.57 88.77,12.57 90.04,11.3 121.79,11.3 122.43,10.67 130.05,10.67 131.32,11.94 v131.32,16.38
BTN_B1  (via drill 0.51)
  Top 0.254: R16.1 v131.32,67.69
  Bottom 0.254: U2.A24 78.61,65.15 79.88,63.88 81.79,63.88 82.42,63.25 83.69,63.25 84.33,63.88 88.77,63.88 90.04,62.61 121.79,62.61 122.43,61.98 130.05,61.98 131.32,63.25 v131.32,67.69
BTN_B2  (via drill 0.51)
  Top 0.254: R24.1 v131.32,119
  Bottom 0.254: U3.A24 78.61,116.46 79.88,115.19 81.79,115.19 82.42,114.55 83.69,114.55 84.33,115.19 88.77,115.19 90.04,113.92 121.79,113.92 122.43,113.28 130.05,113.28 131.32,114.55 v131.32,119
BTN_B3  (via drill 0.51)
  Top 0.254: R32.1 v131.32,170.31
  Bottom 0.254: U4.A24 78.61,167.77 79.88,166.5 81.79,166.5 82.42,165.86 83.69,165.86 84.33,166.5 88.77,166.5 90.04,165.23 121.79,165.23 122.43,164.59 130.05,164.59 131.32,165.86 v131.32,170.31
BTN_B4  (via drill 0.51)
  Top 0.254: R40.1 v131.32,221.62
  Bottom 0.254: U5.A24 78.61,219.07 79.88,217.81 81.79,217.81 82.42,217.17 83.69,217.17 84.33,217.81 88.77,217.81 90.04,216.53 121.79,216.53 122.43,215.9 130.05,215.9 131.32,217.17 v131.32,221.62
BTN_DN
  Top 0.254: U1.A27 74.8,14.48 74.17,13.84 70.36,13.84 68.45,11.94 50.04,11.94 46.86,15.11 R4.1
BTN_DN1
  Top 0.254: U2.A27 74.8,65.79 74.17,65.15 70.36,65.15 68.45,63.25 50.04,63.25 46.86,66.42 R12.1
BTN_DN2
  Top 0.254: U3.A27 74.8,117.09 74.17,116.46 70.36,116.46 68.45,114.55 50.04,114.55 46.86,117.73 R20.1
BTN_DN3
  Top 0.254: U4.A27 74.8,168.4 74.17,167.77 70.36,167.77 68.45,165.86 50.04,165.86 46.86,169.04 R28.1
BTN_DN4
  Top 0.254: U5.A27 74.8,219.71 74.17,219.07 70.36,219.07 68.45,217.17 50.04,217.17 46.86,220.34 R36.1
BTN_L
  Top 0.254: U1.A31 69.72,14.48 67.82,12.57 50.67,12.57 48.77,14.48 R2.1
  pour Top (isolate 0.305): 69.72,15.75 70.99,17.65 73.53,17.65 72.26,15.75
  pour Bottom (isolate 0.305): 72.26,15.75 73.53,17.65 70.99,17.65 69.72,15.75
BTN_L1
  Top 0.254: U2.A31 69.72,65.79 67.82,63.88 50.67,63.88 48.77,65.79 R10.1
  pour Top (isolate 0.305): 69.72,67.06 70.99,68.96 73.53,68.96 72.26,67.06
  pour Bottom (isolate 0.305): 72.26,67.06 73.53,68.96 70.99,68.96 69.72,67.06
BTN_L2
  Top 0.254: U3.A31 69.72,117.09 67.82,115.19 50.67,115.19 48.77,117.09 R18.1
  pour Top (isolate 0.305): 69.72,118.36 70.99,120.27 73.53,120.27 72.26,118.36
  pour Bottom (isolate 0.305): 72.26,118.36 73.53,120.27 70.99,120.27 69.72,118.36
BTN_L3
  Top 0.254: U4.A31 69.72,168.4 67.82,166.5 50.67,166.5 48.77,168.4 R26.1
  pour Top (isolate 0.305): 69.72,169.67 70.99,171.58 73.53,171.58 72.26,169.67
  pour Bottom (isolate 0.305): 72.26,169.67 73.53,171.58 70.99,171.58 69.72,169.67
BTN_L4
  Top 0.254: U5.A31 69.72,219.71 67.82,217.81 50.67,217.81 48.77,219.71 R34.1
  pour Top (isolate 0.305): 69.72,220.98 70.99,222.88 73.53,222.88 72.26,220.98
  pour Bottom (isolate 0.305): 72.26,220.98 73.53,222.88 70.99,222.88 69.72,220.98
BTN_P1  (via drill 0.51)
  Top 0.254: R14.1 135.13,67.69 130.68,63.25 v123.06,63.25
  Bottom 0.254: v123.06,63.25 90.68,63.25 90.04,63.88 U2.A15
BTN_P2  (via drill 0.51)
  Top 0.254: v83.06,64.52 130.68,64.52 133.22,67.06 R13.1
  Bottom 0.254: U2.A23 79.88,65.15 80.52,64.52 v83.06,64.52
BTN_P3  (via drill 0.51)
  Top 0.254: R22.1 135.13,119 130.68,114.55 v123.06,114.55
  Bottom 0.254: v123.06,114.55 90.68,114.55 90.04,115.19 U3.A15
BTN_P4  (via drill 0.51)
  Top 0.254: v83.06,115.82 130.68,115.82 133.22,118.36 R21.1
  Bottom 0.254: U3.A23 79.88,116.46 80.52,115.82 v83.06,115.82
BTN_P5  (via drill 0.51)
  Top 0.254: R30.1 135.13,170.31 130.68,165.86 v123.06,165.86
  Bottom 0.254: v123.06,165.86 90.68,165.86 90.04,166.5 U4.A15
BTN_P6  (via drill 0.51)
  Top 0.254: v83.06,167.13 130.68,167.13 133.22,169.67 R29.1
  Bottom 0.254: U4.A23 79.88,167.77 80.52,167.13 v83.06,167.13
BTN_P7  (via drill 0.51)
  Top 0.254: R38.1 135.13,221.62 130.68,217.17 v123.06,217.17
  Bottom 0.254: v123.06,217.17 90.68,217.17 90.04,217.81 U5.A15
BTN_P8  (via drill 0.51)
  Top 0.254: v83.06,218.44 130.68,218.44 133.22,220.98 R37.1
  Bottom 0.254: U5.A23 79.88,219.07 80.52,218.44 v83.06,218.44
BTN_P12  (via drill 0.51)
  Top 0.254: v83.06,13.21 130.68,13.21 133.22,15.75 R5.1
  Bottom 0.254: U1.A23 79.88,13.84 80.52,13.21 v83.06,13.21
BTN_P16  (via drill 0.51)
  Top 0.254: R6.1 135.13,16.38 130.68,11.94 v123.06,11.94
  Bottom 0.254: v123.06,11.94 90.68,11.94 90.04,12.57 U1.A15
BTN_R
  Top 0.254: U1.A22 82.42,17.65 82.42,14.48 81.15,13.21 70.99,13.21 69.09,11.3 49.4,11.3 44.96,15.75 R3.1
  pour Top (isolate 0.305): 81.15,17.65 82.42,15.75 84.96,15.75 83.69,17.65
  pour Bottom (isolate 0.305): 83.69,17.65 84.96,15.75 82.42,15.75 81.15,17.65
BTN_R1
  Top 0.254: U2.A22 82.42,68.96 82.42,65.79 81.15,64.52 70.99,64.52 69.09,62.61 49.4,62.61 44.96,67.06 R11.1
  pour Top (isolate 0.305): 81.15,68.96 82.42,67.06 84.96,67.06 83.69,68.96
  pour Bottom (isolate 0.305): 83.69,68.96 84.96,67.06 82.42,67.06 81.15,68.96
BTN_R2
  Top 0.254: U3.A22 82.42,120.26 82.42,120.27 82.42,117.09 81.15,115.82 70.99,115.82 69.09,113.92 49.4,113.92 44.96,118.36 R19.1
  pour Top (isolate 0.305): 81.15,120.27 82.42,118.36 84.96,118.36 83.69,120.27
  pour Bottom (isolate 0.305): 83.69,120.27 84.96,118.36 82.42,118.36 81.15,120.27
BTN_R3
  Top 0.254: U4.A22 82.42,171.57 82.42,171.58 82.42,168.4 81.15,167.13 70.99,167.13 69.09,165.23 49.4,165.23 44.96,169.67 R27.1
  pour Top (isolate 0.305): 81.15,171.58 82.42,169.67 84.96,169.67 83.69,171.58
  pour Bottom (isolate 0.305): 83.69,171.58 84.96,169.67 82.42,169.67 81.15,171.58
BTN_R4
  Top 0.254: U5.A22 82.42,222.88 82.42,219.71 81.15,218.44 70.99,218.44 69.09,216.53 49.4,216.53 44.96,220.98 R35.1
  pour Top (isolate 0.305): 81.15,222.88 82.42,220.98 84.96,220.98 83.69,222.88
  pour Bottom (isolate 0.305): 83.69,222.88 84.96,220.98 82.42,220.98 81.15,222.88
BTN_UP
  Top 0.254: R1.1 50.67,13.84 51.31,13.21 61.47,13.21 62.1,13.84 U1.A37
  pour Top (isolate 0.305): 59.56,15.75 60.83,17.65 63.37,17.65 62.1,15.75
  pour Bottom (isolate 0.305): 62.1,15.75 63.37,17.65 60.83,17.65 59.56,15.75
BTN_UP1
  Top 0.254: R9.1 50.67,65.15 51.31,64.52 61.47,64.52 62.1,65.15 U2.A37
  pour Top (isolate 0.305): 59.56,67.06 60.83,68.96 63.37,68.96 62.1,67.06
  pour Bottom (isolate 0.305): 62.1,67.06 63.37,68.96 60.83,68.96 59.56,67.06
BTN_UP2
  Top 0.254: R17.1 50.67,116.46 51.31,115.82 61.47,115.82 62.1,116.46 U3.A37
  pour Top (isolate 0.305): 59.56,118.36 60.83,120.27 63.37,120.27 62.1,118.36
  pour Bottom (isolate 0.305): 62.1,118.36 63.37,120.27 60.83,120.27 59.56,118.36
BTN_UP3
  Top 0.254: R25.1 50.67,167.77 51.31,167.13 61.47,167.13 62.1,167.77 U4.A37
  pour Top (isolate 0.305): 59.56,169.67 60.83,171.58 63.37,171.58 62.1,169.67
  pour Bottom (isolate 0.305): 62.1,169.67 63.37,171.58 60.83,171.58 59.56,169.67
BTN_UP4
  Top 0.254: R33.1 50.67,219.07 51.31,218.44 61.47,218.44 62.1,219.07 U5.A37
  pour Top (isolate 0.305): 59.56,220.98 60.83,222.88 63.37,222.88 62.1,220.98
  pour Bottom (isolate 0.305): 62.1,220.98 63.37,222.88 60.83,222.88 59.56,220.98
GND  (via drill 0.51)
  Bottom 0.254: J2.P3 J2.P1 | J3.P3 J3.P1 | J5.P3 J5.P1 | J4.P1 J4.P3 | J6.P1 J6.P3 | J7.P1 J7.P3
  other vias: 9.4,9.4 19.56,8.13 32.26,8.13 44.96,8.13 57.66,8.13 70.36,8.13 83.06,8.13 95.76,8.13 108.46,8.13 121.16,8.13 133.86,8.13 146.56,8.13 156.72,9.4 157.35,55.12 146.56,56.39 133.86,56.39 121.16,56.39 108.46,56.39 95.76,56.39 83.06,56.39 70.36,56.39 57.66,56.39 45.59,56.39 32.26,56.39 19.56,56.39 8.76,55.12 8.13,19.56 8.13,32.26 8.13,44.96 157.99,19.56 157.99,32.26 157.99,44.96 83.06,24.64 58.93,24.64 109.73,24.64 32.89,45.59 27.18,27.18 41.78,36.07 53.85,32.26 121.16,19.56 126.87,9.4 142.11,22.73 146.56,30.99 117.98,48.77 137.67,40.51 127.51,34.8 121.16,46.86 22.73,33.53 25.91,33.53 17.65,50.04 135.13,30.99
  pour Top (isolate 0.305, rank 5): 6.86,57.66 157.46,57.66 arc-90 159.26,55.86 159.26,6.86 6.86,6.86
  pour Bottom (isolate 0.305, rank 5): 159.26,57.66 8.65,57.66 arc90 6.86,55.86 6.86,6.86 159.26,6.86
GND1  (via drill 0.51)
  Bottom 0.254: J9.P3 J9.P1 | J10.P3 J10.P1 | J12.P3 J12.P1 | J11.P1 J11.P3 | J13.P1 J13.P3 | J14.P1 J14.P3
  other vias: 9.4,60.71 19.56,59.44 32.26,59.44 44.96,59.44 57.66,59.44 70.36,59.44 83.06,59.44 95.76,59.44 108.46,59.44 121.16,59.44 133.86,59.44 146.56,59.44 156.72,60.71 157.35,106.43 146.56,107.7 133.86,107.7 121.16,107.7 108.46,107.7 95.76,107.7 83.06,107.7 70.36,107.7 57.66,107.7 45.59,107.7 32.26,107.7 19.56,107.7 8.76,106.43 8.13,70.87 8.13,83.57 8.13,96.27 157.99,70.87 157.99,83.57 157.99,96.27 83.06,75.95 58.93,75.95 109.73,75.95 32.89,96.9 27.18,78.49 41.78,87.38 53.85,83.57 121.16,70.87 126.87,60.71 142.11,74.04 146.56,82.3 117.98,100.08 137.67,91.82 127.51,86.11 121.16,98.17 22.73,84.84 25.91,84.84 17.65,101.35 135.13,82.3
  pour Top (isolate 0.305, rank 5): 6.86,108.97 157.46,108.97 arc-90 159.26,107.17 159.26,58.17 6.86,58.17
  pour Bottom (isolate 0.305, rank 5): 159.26,108.97 8.65,108.97 arc90 6.86,107.17 6.86,58.17 159.26,58.17
GND2  (via drill 0.51)
  Bottom 0.254: J17.P3 J17.P1 | J18.P3 J18.P1 | J20.P3 J20.P1 | J19.P1 J19.P3 | J21.P1 J21.P3 | J22.P1 J22.P3
  other vias: 9.4,112.01 19.56,110.74 32.26,110.74 44.96,110.74 57.66,110.74 70.36,110.74 83.06,110.74 95.76,110.74 108.46,110.74 121.16,110.74 133.86,110.74 146.56,110.74 156.72,112.01 157.35,157.73 146.56,159 133.86,159 121.16,159 108.46,159 95.76,159 83.06,159 70.36,159 57.66,159 45.59,159 32.26,159 19.56,159 8.76,157.73 8.13,122.17 8.13,134.87 8.13,147.57 157.99,122.17 157.99,134.87 157.99,147.57 83.06,127.25 58.93,127.25 109.73,127.25 32.89,148.21 27.18,129.79 41.78,138.68 53.85,134.87 121.16,122.17 126.87,112.01 142.11,125.35 146.56,133.6 117.98,151.38 137.67,143.13 127.51,137.41 121.16,149.48 22.73,136.14 25.91,136.14 17.65,152.65 135.13,133.6
  pour Top (isolate 0.305, rank 5): 6.86,160.27 157.46,160.27 arc-90 159.26,158.48 159.26,109.47 6.86,109.47
  pour Bottom (isolate 0.305, rank 5): 159.26,160.27 8.65,160.27 arc90 6.86,158.48 6.86,109.47 159.26,109.47
GND3  (via drill 0.51)
  Bottom 0.254: J25.P3 J25.P1 | J26.P3 J26.P1 | J28.P3 J28.P1 | J27.P1 J27.P3 | J29.P1 J29.P3 | J30.P1 J30.P3
  other vias: 9.4,163.32 19.56,162.05 32.26,162.05 44.96,162.05 57.66,162.05 70.36,162.05 83.06,162.05 95.76,162.05 108.46,162.05 121.16,162.05 133.86,162.05 146.56,162.05 156.72,163.32 157.35,209.04 146.56,210.31 133.86,210.31 121.16,210.31 108.46,210.31 95.76,210.31 83.06,210.31 70.36,210.31 57.66,210.31 45.59,210.31 32.26,210.31 19.56,210.31 8.76,209.04 8.13,173.48 8.13,186.18 8.13,198.88 157.99,173.48 157.99,186.18 157.99,198.88 83.06,178.56 58.93,178.56 109.73,178.56 32.89,199.52 27.18,181.1 41.78,189.99 53.85,186.18 121.16,173.48 126.87,163.32 142.11,176.66 146.56,184.91 117.98,202.69 137.67,194.44 127.51,188.72 121.16,200.79 22.73,187.45 25.91,187.45 17.65,203.96 135.13,184.91
  pour Top (isolate 0.305, rank 5): 6.86,211.58 157.46,211.58 arc-90 159.26,209.79 159.26,160.78 6.86,160.78
  pour Bottom (isolate 0.305, rank 5): 159.26,211.58 8.65,211.58 arc90 6.86,209.79 6.86,160.78 159.26,160.78
GND4  (via drill 0.51)
  Bottom 0.254: J33.P3 J33.P1 | J34.P3 J34.P1 | J36.P3 J36.P1 | J35.P1 J35.P3 | J37.P1 J37.P3 | J38.P1 J38.P3
  other vias: 9.4,214.63 19.56,213.36 32.26,213.36 44.96,213.36 57.66,213.36 70.36,213.36 83.06,213.36 95.76,213.36 108.46,213.36 121.16,213.36 133.86,213.36 146.56,213.36 156.72,214.63 157.35,260.35 146.56,261.62 133.86,261.62 121.16,261.62 108.46,261.62 95.76,261.62 83.06,261.62 70.36,261.62 57.66,261.62 45.59,261.62 32.26,261.62 19.56,261.62 8.76,260.35 8.13,224.79 8.13,237.49 8.13,250.19 157.99,224.79 157.99,237.49 157.99,250.19 83.06,229.87 58.93,229.87 109.73,229.87 32.89,250.82 27.18,232.41 41.78,241.3 53.85,237.49 121.16,224.79 126.87,214.63 142.11,227.97 146.56,236.22 117.98,254 137.67,245.75 127.51,240.03 121.16,252.09 22.73,238.76 25.91,238.76 17.65,255.27 135.13,236.22
  pour Top (isolate 0.305, rank 5): 6.86,262.89 157.46,262.89 arc-90 159.26,261.09 159.26,212.09 6.86,212.09
  pour Bottom (isolate 0.305, rank 5): 159.26,262.89 8.65,262.89 arc90 6.86,261.09 6.86,212.09 159.26,212.09
N$1  (via drill 0.51)
  Top 0.254: R1.2 50.67,22.1 49.4,23.37 v49.4,31.62 | 31.58,31.66 v31.62,31.62 31.62,38.61 29.04,41.19 S1.3
  Bottom 0.254: J2.P4 J2.P2 15.21,39.15 15.75,38.61 15.75,32.89 17.02,31.62 v31.62,31.62 v49.4,31.62
N$2  (via drill 0.51)
  Top 0.254: R2.2 48.77,30.99 48.13,31.62 v48.13,32.89 | S4.3 24.14,34.76 v24.1,34.8
  Bottom 0.254: J5.P4 J5.P2 v24.1,34.8 24.1,32.8 24.64,32.26 30.35,32.26 30.99,32.89 32.26,32.89 32.89,32.26 47.5,32.26 v48.13,32.89
N$3  (via drill 0.51)
  Top 0.254: R4.2 46.86,21.46 48.13,22.73 48.13,29.72 v47.5,30.35 46.86,30.99 46.86,34.8 50.67,38.61 v53.85,38.61 | v42.42,30.35 42.42,24 41.74,23.33 S2.3
  Bottom 0.254: J4.P4 J4.P2 54.58,39.34 v53.85,38.61 | v47.5,30.35 46.86,30.99 43.05,30.99 v42.42,30.35
N$4  (via drill 0.51)
  Top 0.254: S3.1 45,34.76 v45.59,34.16 46.23,33.53 46.23,30.35 47.5,29.08 47.5,24 44.96,21.46 R3.2
  Bottom 0.254: J3.P4 J3.P2 45.69,37.43 45.59,37.43 v45.59,34.16
N$5  (via drill 0.51)
  Top 0.254: R6.2 135.13,27.18 136.4,28.45 145.29,28.45 | 145.29,28.45 145.29,25.32 S6.3 | v151.64,37.34 151.64,29.72 150.37,28.45 145.29,28.45
  Bottom 0.254: J7.P4 J7.P2 154.91,40.61 v151.64,37.34
N$6  (via drill 0.51)
  Top 0.254: R8.2 v131.32,28.45
  Bottom 0.254: J8.P4 J8.P2 124.43,29.62 125.6,28.45 v131.32,28.45
N$7  (via drill 0.51)
  Top 0.254: R7.2 114.81,37.34 v115.44,37.97
  Bottom 0.254: J1.P4 J1.P2 115.54,38.07 v115.44,37.97
N$8  (via drill 0.51)
  Top 0.254: R9.2 50.67,73.41 49.4,74.68 v49.4,82.93 | 31.58,82.97 v31.62,82.93 31.62,89.92 29.04,92.5 S7.3
  Bottom 0.254: J9.P4 J9.P2 15.21,90.46 15.75,89.92 15.75,84.2 17.02,82.93 v31.62,82.93 v49.4,82.93
N$9  (via drill 0.51)
  Top 0.254: R10.2 48.77,82.3 48.13,82.93 v48.13,84.2 | S10.3 24.14,86.07 v24.1,86.11
  Bottom 0.254: J12.P4 J12.P2 v24.1,86.11 24.1,84.11 24.64,83.57 30.35,83.57 30.99,84.2 32.26,84.2 32.89,83.57 47.5,83.57 v48.13,84.2
N$10  (via drill 0.51)
  Top 0.254: R12.2 46.86,72.77 48.13,74.04 48.13,81.03 v47.5,81.66 46.86,82.3 46.86,86.11 50.67,89.92 v53.85,89.92 | v42.42,81.66 42.42,75.31 41.74,74.64 S8.3
  Bottom 0.254: J11.P4 J11.P2 54.58,90.65 v53.85,89.92 | v47.5,81.66 46.86,82.3 43.05,82.3 v42.42,81.66
N$11  (via drill 0.51)
  Top 0.254: S9.1 45,86.07 v45.59,85.47 46.23,84.84 46.23,81.66 47.5,80.39 47.5,75.31 44.96,72.77 R11.2
  Bottom 0.254: J10.P4 J10.P2 45.69,88.74 45.59,88.74 v45.59,85.47
N$12  (via drill 0.51)
  Top 0.254: v145.29,87.38 135.76,87.38 133.22,84.84 133.22,82.3 | 133.22,82.3 R13.2 | S11.3 126.2,80.99 127.51,82.3 133.22,82.3
  Bottom 0.254: J13.P4 J13.P2 146.02,88.11 v145.29,87.38
N$13  (via drill 0.51)
  Top 0.254: R14.2 135.13,78.49 136.4,79.76 145.29,79.76 | 145.29,79.76 145.29,76.63 S12.3 | v151.64,88.65 151.64,81.03 150.37,79.76 145.29,79.76
  Bottom 0.254: J14.P4 J14.P2 154.91,91.92 v151.64,88.65
N$14  (via drill 0.51)
  Top 0.254: R15.2 114.81,88.65 v115.44,89.28
  Bottom 0.254: J15.P4 J15.P2 115.54,89.38 v115.44,89.28
N$15  (via drill 0.51)
  Top 0.254: R16.2 v131.32,79.76
  Bottom 0.254: J16.P4 J16.P2 124.43,80.93 125.6,79.76 v131.32,79.76
N$16  (via drill 0.51)
  Top 0.254: R17.2 50.67,124.71 49.4,125.98 v49.4,134.24 | 31.58,134.28 v31.62,134.24 31.62,141.22 29.04,143.8 S13.3
  Bottom 0.254: J17.P4 J17.P2 15.21,141.76 15.75,141.22 15.75,135.51 17.02,134.24 v31.62,134.24 v49.4,134.24
N$17  (via drill 0.51)
  Top 0.254: R18.2 48.77,133.6 48.13,134.24 v48.13,135.51 | S16.3 24.14,137.37 v24.1,137.41
  Bottom 0.254: J20.P4 J20.P2 v24.1,137.41 24.1,135.41 24.64,134.87 30.35,134.87 30.99,135.51 32.26,135.51 32.89,134.87 47.5,134.87 v48.13,135.51
N$18  (via drill 0.51)
  Top 0.254: R20.2 46.86,124.08 48.13,125.35 48.13,132.33 v47.5,132.97 46.86,133.6 46.86,137.41 50.67,141.22 v53.85,141.22 | v42.42,132.97 42.42,126.62 41.74,125.94 S14.3
  Bottom 0.254: J19.P4 J19.P2 54.58,141.95 v53.85,141.22 | v47.5,132.97 46.86,133.6 43.05,133.6 v42.42,132.97
N$19  (via drill 0.51)
  Top 0.254: S15.1 45,137.37 v45.59,136.78 46.23,136.14 46.23,132.97 47.5,131.7 47.5,126.62 44.96,124.08 R19.2
  Bottom 0.254: J18.P4 J18.P2 45.69,140.05 45.59,140.05 v45.59,136.78
N$20  (via drill 0.51)
  Top 0.254: v145.29,138.68 135.76,138.68 133.22,136.14 133.22,133.6 | 133.22,133.6 R21.2 | S17.3 126.2,132.29 127.51,133.6 133.22,133.6
  Bottom 0.254: J21.P4 J21.P2 146.02,139.41 v145.29,138.68
N$21  (via drill 0.51)
  Top 0.254: R22.2 135.13,129.79 136.4,131.06 145.29,131.06 | 145.29,131.06 145.29,127.94 S18.3 | v151.64,139.95 151.64,132.33 150.37,131.06 145.29,131.06
  Bottom 0.254: J22.P4 J22.P2 154.91,143.22 v151.64,139.95
N$22  (via drill 0.51)
  Top 0.254: R23.2 114.81,139.95 v115.44,140.59
  Bottom 0.254: J23.P4 J23.P2 115.54,140.68 v115.44,140.59
N$23  (via drill 0.51)
  Top 0.254: R24.2 v131.32,131.06
  Bottom 0.254: J24.P4 J24.P2 124.43,132.24 125.6,131.06 v131.32,131.06
N$24  (via drill 0.51)
  Top 0.254: R25.2 50.67,176.02 49.4,177.29 v49.4,185.55 | 31.58,185.59 v31.62,185.55 31.62,192.53 29.04,195.11 S19.3
  Bottom 0.254: J25.P4 J25.P2 15.21,193.07 15.75,192.53 15.75,186.82 17.02,185.55 v31.62,185.55 v49.4,185.55
N$25  (via drill 0.51)
  Top 0.254: R26.2 48.77,184.91 48.13,185.55 v48.13,186.82 | S22.3 24.14,188.68 v24.1,188.72
  Bottom 0.254: J28.P4 J28.P2 v24.1,188.72 24.1,186.72 24.64,186.18 30.35,186.18 30.99,186.82 32.26,186.82 32.89,186.18 47.5,186.18 v48.13,186.82
N$26  (via drill 0.51)
  Top 0.254: R28.2 46.86,175.39 48.13,176.66 48.13,183.64 v47.5,184.28 46.86,184.91 46.86,188.72 50.67,192.53 v53.85,192.53 | v42.42,184.28 42.42,177.93 41.74,177.25 S20.3
  Bottom 0.254: J27.P4 J27.P2 54.58,193.26 v53.85,192.53 | v47.5,184.28 46.86,184.91 43.05,184.91 v42.42,184.28
N$27  (via drill 0.51)
  Top 0.254: S21.1 45,188.68 v45.59,188.09 46.23,187.45 46.23,184.28 47.5,183.01 47.5,177.93 44.96,175.39 R27.2
  Bottom 0.254: J26.P4 J26.P2 45.69,191.36 45.59,191.36 v45.59,188.09
N$28  (via drill 0.51)
  Top 0.254: v145.29,189.99 135.76,189.99 133.22,187.45 133.22,184.91 | 133.22,184.91 R29.2 | S23.3 126.2,183.6 127.51,184.91 133.22,184.91
  Bottom 0.254: J29.P4 J29.P2 146.02,190.72 v145.29,189.99
N$29  (via drill 0.51)
  Top 0.254: R30.2 135.13,181.1 136.4,182.37 145.29,182.37 | 145.29,182.37 145.29,179.25 S24.3 | v151.64,191.26 151.64,183.64 150.37,182.37 145.29,182.37
  Bottom 0.254: J30.P4 J30.P2 154.91,194.53 v151.64,191.26
N$30  (via drill 0.51)
  Top 0.254: R31.2 114.81,191.26 v115.44,191.9
  Bottom 0.254: J31.P4 J31.P2 115.54,191.99 v115.44,191.9
N$31  (via drill 0.51)
  Top 0.254: R32.2 v131.32,182.37
  Bottom 0.254: J32.P4 J32.P2 124.43,183.55 125.6,182.37 v131.32,182.37
N$32  (via drill 0.51)
  Top 0.254: R33.2 50.67,227.33 49.4,228.6 v49.4,236.85 | 31.58,236.9 v31.62,236.85 31.62,243.84 29.04,246.42 S25.3
  Bottom 0.254: J33.P4 J33.P2 15.21,244.38 15.75,243.84 15.75,238.12 17.02,236.85 v31.62,236.85 v49.4,236.85
N$33  (via drill 0.51)
  Top 0.254: R34.2 48.77,236.22 48.13,236.85 v48.13,238.12 | S28.3 24.14,239.99 v24.1,240.03
  Bottom 0.254: J36.P4 J36.P2 v24.1,240.03 24.1,238.03 24.64,237.49 30.35,237.49 30.99,238.12 32.26,238.12 32.89,237.49 47.5,237.49 v48.13,238.12
N$34  (via drill 0.51)
  Top 0.254: R36.2 46.86,226.69 48.13,227.97 48.13,234.95 v47.5,235.59 46.86,236.22 46.86,240.03 50.67,243.84 v53.85,243.84 | v42.42,235.59 42.42,229.24 41.74,228.56 S26.3
  Bottom 0.254: J35.P4 J35.P2 54.58,244.57 v53.85,243.84 | v47.5,235.59 46.86,236.22 43.05,236.22 v42.42,235.59
N$35  (via drill 0.51)
  Top 0.254: S27.1 45,239.99 v45.59,239.4 46.23,238.76 46.23,235.59 47.5,234.31 47.5,229.24 44.96,226.69 R35.2
  Bottom 0.254: J34.P4 J34.P2 45.69,242.66 45.59,242.66 v45.59,239.4
N$36  (via drill 0.51)
  Top 0.254: v145.29,241.3 135.76,241.3 133.22,238.76 133.22,236.22 | 133.22,236.22 R37.2 | S29.3 126.2,234.91 127.51,236.22 133.22,236.22
  Bottom 0.254: J37.P4 J37.P2 146.02,242.03 v145.29,241.3
N$37  (via drill 0.51)
  Top 0.254: R38.2 135.13,232.41 136.4,233.68 145.29,233.68 | 145.29,233.68 145.29,230.56 S30.3 | v151.64,242.57 151.64,234.95 150.37,233.68 145.29,233.68
  Bottom 0.254: J38.P4 J38.P2 154.91,245.84 v151.64,242.57
N$38  (via drill 0.51)
  Top 0.254: R39.2 114.81,242.57 v115.44,243.21
  Bottom 0.254: J39.P4 J39.P2 115.54,243.3 v115.44,243.21
N$39  (via drill 0.51)
  Top 0.254: R40.2 v131.32,233.68
  Bottom 0.254: J40.P4 J40.P2 124.43,234.85 125.6,233.68 v131.32,233.68
N$80  (via drill 0.51)
  Top 0.254: v145.29,36.07 135.76,36.07 133.22,33.53 133.22,30.99 | 133.22,30.99 R5.2 | S5.3 126.2,29.68 127.51,30.99 133.22,30.99
  Bottom 0.254: J6.P4 J6.P2 146.02,36.8 v145.29,36.07

## Text on the board
Bottom: v10 | v10 | v10 | v10 | v10
Dimension: Route Out | Route Out | ROUTE / OUT | Route Out | Route Out | ROUTE / OUT | Route Out | Route Out | ROUTE / OUT | Route Out | Route Out | ROUTE / OUT | Route Out | Route Out | ROUTE / OUT | Route Out | Route Out
tPlace: P0 | P12 | P16 | P1 | P2 | P8 | P0 | P12 | P16 | P1 | P2 | P8 | P0 | P12 | P16 | P1 | P2 | P8 | P0 | P12 | P16 | P1 | P2 | P8 | P0 | P12 | P16 | P1 | P2 | P8
bPlace: P0 | P1 | P2 | P8 | A | B | P12 | P16 | sparkfun.com/microbit | P0 | P1 | P2 | P8 | A | B | P12 | P16 | sparkfun.com/microbit | P0 | P1 | P2 | P8 | A | B | P12 | P16 | sparkfun.com/microbit | P0 | P1 | P2 | P8 | A | B | P12 | P16 | sparkfun.com/microbit | P0 | P1 | P2 | P8 | A | B | P12 | P16 | sparkfun.com/microbit